# Allegro board ozone_motors_v2.brd
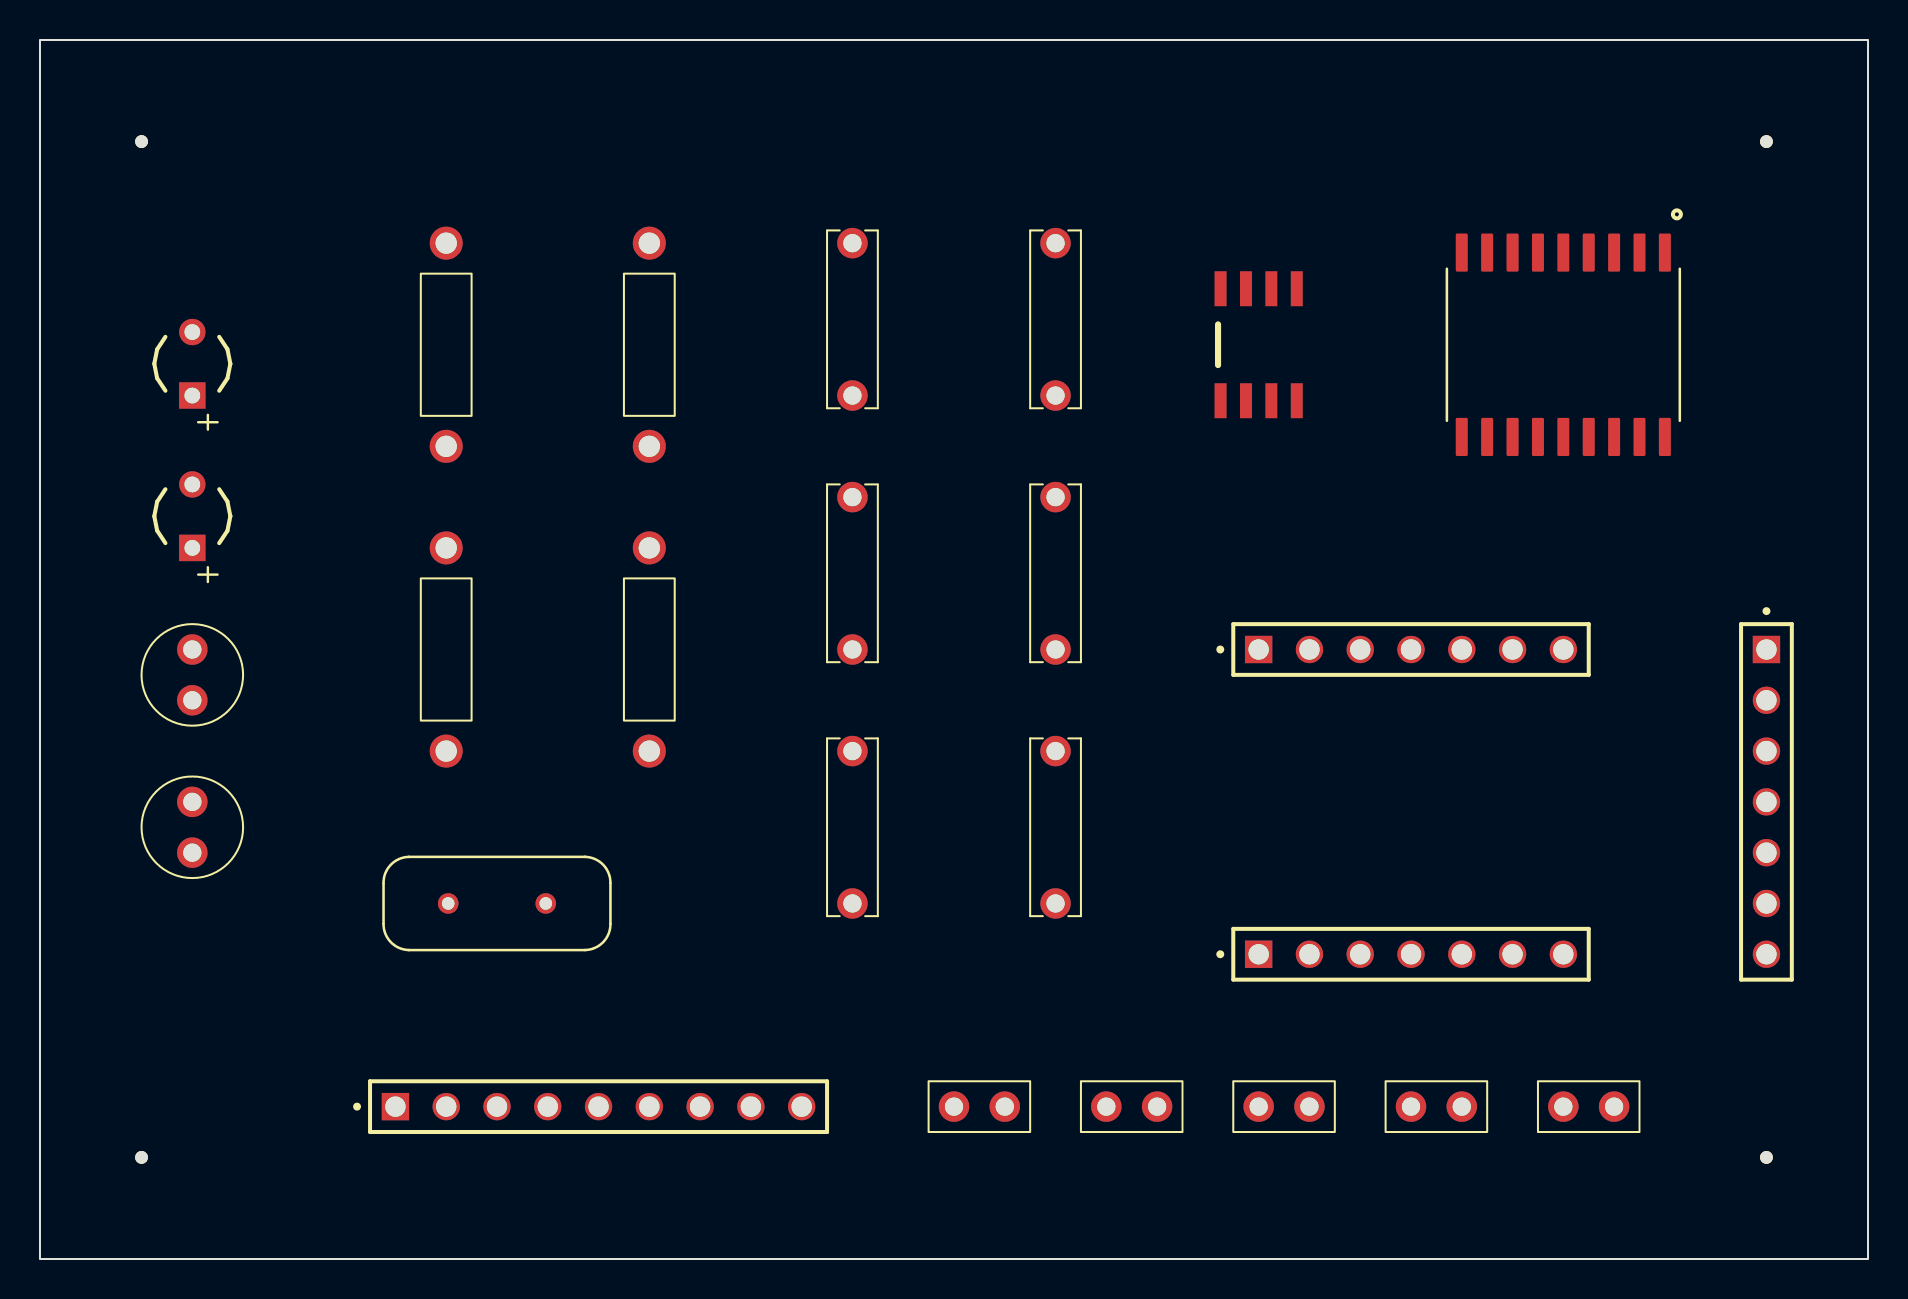
[diagram p0: board, top side]
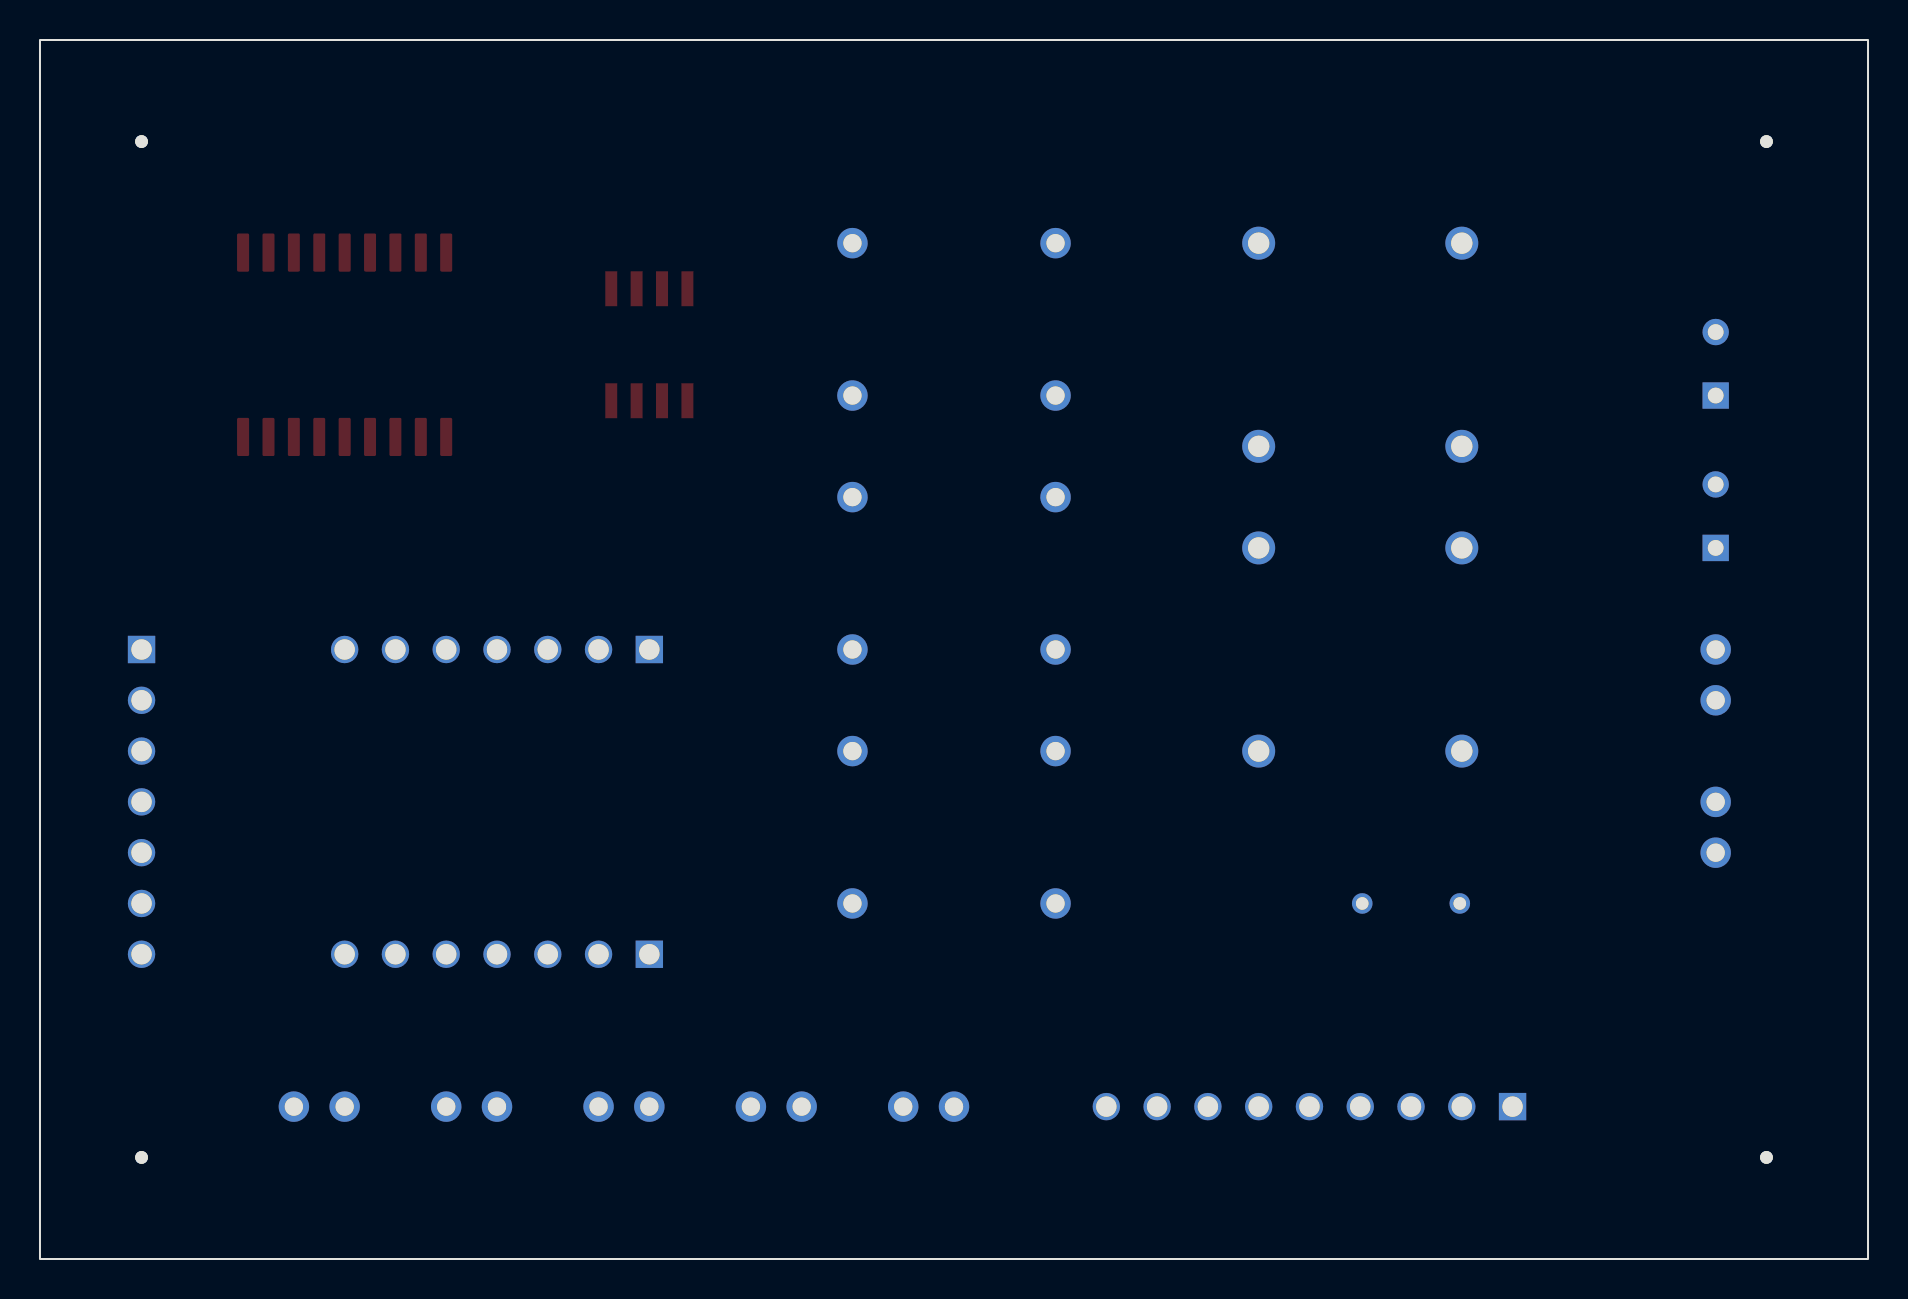
[diagram p1: board, bottom side, seen from below]

Outline 91.44 x 60.96 mm; copper layers: TOP, BOTTOM. Coordinates in mm from the lower left corner of the outline.
Outline path: rectangle 0,0 91.44,60.96

## Design rules (mm)
constraint set DEFAULT: min track width 0.381
nets with their own width: min track width 0.762; nets 3.3V 5V GND

## Placement (name value [footprint] x y rotation side)
C1  CAP NP  [CAP300]  40.64 43.18 90 top
C2  CAP NP  [CAP300]  50.8 43.18 90 top
C3  CAP  [CAP196]  7.62 20.32 0 top
C4  CAP NP  [CAP300]  40.64 38.1 270 top
C5  CAP NP  [CAP300]  50.8 38.1 270 top
C6  CAP  [CAP196]  7.62 27.94 0 top
C7  CAP NP  [CAP300]  40.64 17.78 90 top
C8  CAP NP  [CAP300]  50.8 17.78 90 top
D1  LED  [CPCYL1D150LS125031]  7.62 35.56 90 top
D2  LED  [CPCYL1D150LS125031]  7.62 43.18 90 top
J1  CON2  [JUMPER2]  68.58 7.62 0 top
J2  CON7  [SAMTEC_DW-07-10-G-S-630]  86.36 30.48 270 top
J3  CON2  [JUMPER2]  76.2 7.62 0 top
J4  CON2  [JUMPER2]  60.96 7.62 0 top
J5  CON9  [SAMTEC_DW-09-15-T-S-400]  17.78 7.62 0 top
J6  CON7  [SAMTEC_DW-07-10-G-S-630]  60.96 15.24 0 top
J7  CON7  [SAMTEC_DW-07-10-G-S-630]  60.96 30.48 0 top
J8  PWR_MCP  [JUMPER2]  53.34 7.62 0 top
J9  PWR_TJA  [JUMPER2]  45.72 7.62 0 top
NOREF  -  [unnamed]  86.36 5.08 0 top
NOREF#2  -  [unnamed]  5.08 5.08 0 top
NOREF#3  -  [unnamed]  86.36 55.88 0 top
NOREF#4  -  [unnamed]  5.08 55.88 0 top
U1  MCP2515-ESO  [SOIC127P1030X265-18N]  76.2 45.72 270 top
U2  TJA1050T  [SOP8]  60.96 45.72 0 top
UNK1K1  RESISTOR  [RES400]  30.48 25.4 0 top
UNK1K2  RESISTOR  [RES400]  20.32 40.64 0 top
UNK10K1  RESISTOR  [RES400]  30.48 40.64 0 top
UNK120R1  RESISTOR  [RES400]  20.32 25.4 0 top
Y1  CRYSTAL  [XTAL_ECS-160-20-4X]  22.86 17.78 0 top

## Library data of the parts
C1 C2 C4 C5 C7 C8 = CAP NP: Tolerance: ***; User Part Number: ***
C3 C6 = CAP: Tolerance: ***; User Part Number: ***
D1 D2 = LED
J1 J3 J4 J8 J9 = CON2: User Part Number: ***
J2 J6 J7 = CON7_0
J5 = CON9_2
U1 = MCP2515-ESO_0
U2 = TJA1050T
UNK1K1 UNK1K2 UNK10K1 UNK120R1 = RESISTOR: Tolerance: ***; User Part Number: ***
Y1 = CRYSTAL

## Footprints (pads in the part's own frame, mm; a bottom-side part is the same pattern mirrored in y, then rotated)
CAP196
  round 1.524 hole 0.914: 1(0,0) 2(0,2.54)
CAP300
  round 1.524 hole 0.914: 1(0,0) 2(7.62,0)
CPCYL1D150LS125031
  rect 1.321x1.321 hole 0.787: 1(0,0)
  round 1.321 hole 0.787: 2(3.175,0)
JUMPER2
  round 1.524 hole 0.914: 1(0,0) 2(2.54,0)
RES400
  round 1.651 hole 1.067: 1(0,0) 2(0,10.16)
SAMTEC_DW-07-10-G-S-630
  rect 1.37x1.37 hole 1.02: 01(0,0)
  round 1.37 hole 1.02: 02(2.54,0) 03(5.08,0) 04(7.62,0) 05(10.16,0) 06(12.7,0) 07(15.24,0)
SAMTEC_DW-09-15-T-S-400
  rect 1.37x1.37 hole 1.02: 01(0,0)
  round 1.37 hole 1.02: 02(2.54,0) 03(5.08,0) 04(7.62,0) 05(10.16,0) 06(12.7,0) 07(15.24,0) 08(17.78,0) 09(20.32,0)
SOIC127P1030X265-18N
  custom 1.91x0.6 smd: 1(-4.61,5.08) 2(-4.61,3.81) 3(-4.61,2.54) 4(-4.61,1.27) 5(-4.61,0) 6(-4.61,-1.27) 7(-4.61,-2.54) 8(-4.61,-3.81) 9(-4.61,-5.08) 10(4.61,-5.08) 11(4.61,-3.81) 12(4.61,-2.54) 13(4.61,-1.27) 14(4.61,0) 15(4.61,1.27) 16(4.61,2.54) 17(4.61,3.81) 18(4.61,5.08)
SOP8
  rect 0.6x1.75 smd: 1(-1.905,-2.8) 2(-0.635,-2.8) 3(0.635,-2.8) 4(1.905,-2.8) 5(1.905,2.8) 6(0.635,2.8) 7(-0.635,2.8) 8(-1.905,2.8)
unnamed
  round 0.635 hole 3.175 unplated: (0,0)
XTAL_ECS-160-20-4X
  round 1.03 hole 0.63: 1(-2.44,0) 2(2.44,0)

## Nets
3.3V: C3.1 C4.1 C5.1 J2.01 J5.01 J7.03 J8.1 U1.18 UNK1K2.1 UNK10K1.1
5V: C6.1 C7.1 C8.1 J7.01 J9.1 U2.3 UNK1K1.1
GND: C1.2 C2.2 C3.2 C4.2 C5.2 C6.2 C7.2 C8.2 D1.1(CATHODE) D2.1(CATHODE) J2.02 J5.02 J7.02 J8.2 J9.2 U1.9(VSS) U2.2 U2.8
CAN_RX: U1.2 U2.4
CAN_TX: U1.1 U2.1
CS: J2.03 J7.07(7) U1.16
D0/A0/DAC: J5.05 J6.01
D1/A1: J5.06 J6.02
D2/A2: J5.07 J6.03
D3/A3: J5.08 J6.04
D4/A4/SDA: J5.03 J6.05
D5/A5/SCL: J5.04 J6.06
INT: J2.07(7) U1.12
MISO: J2.04 J7.05 U1.15
MOSI: J2.05 J7.04 U1.14
OSC1: C1.1 U1.8 Y1.1
OSC2: C2.1 U1.7 Y1.2
RESET: U1.17 UNK10K1.2
SCK: J2.06 J7.06 U1.13
TX: J5.09(9) J6.07(7)
N01226: J3.1 J4.1 U2.7 UNK120R1.1
N01238: J1.2 J3.2 J4.2 U2.6
N01258: J1.1 UNK120R1.2
N02673: D2.2 UNK1K2.2
N02677: D1.2 UNK1K1.2

Pads without a net: U1 3 4 5 6 10 11; U2 5
